# Altium PCB Thermostat_EEM_Cryo.PCBDOC (part 1 of 2)
Units mm, origin at the board's own origin, x right, y up, seen from the top; angles counter-clockwise.
Board outline 44.89 x 73.5 mm, 4 copper layers (TOP, G1, L2, BOT), stack 1.55 mm thick; 85 components, 79 nets, 401 pads, 80 vias.
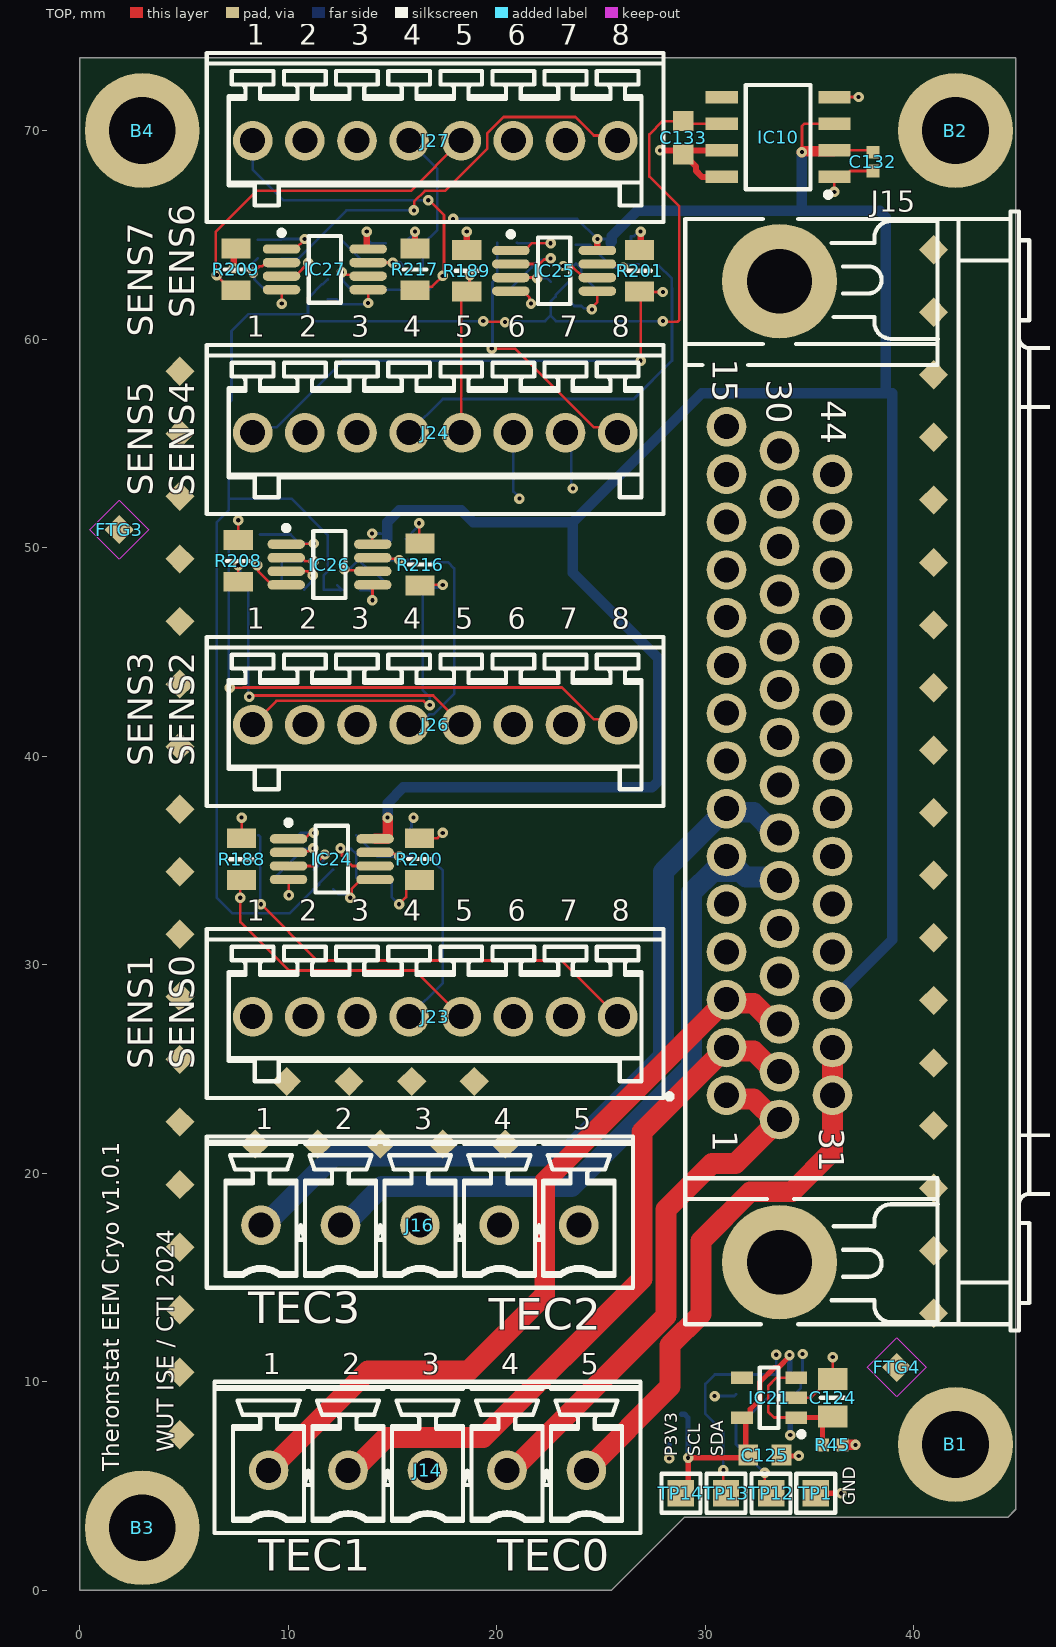
[diagram p0: TOP view]
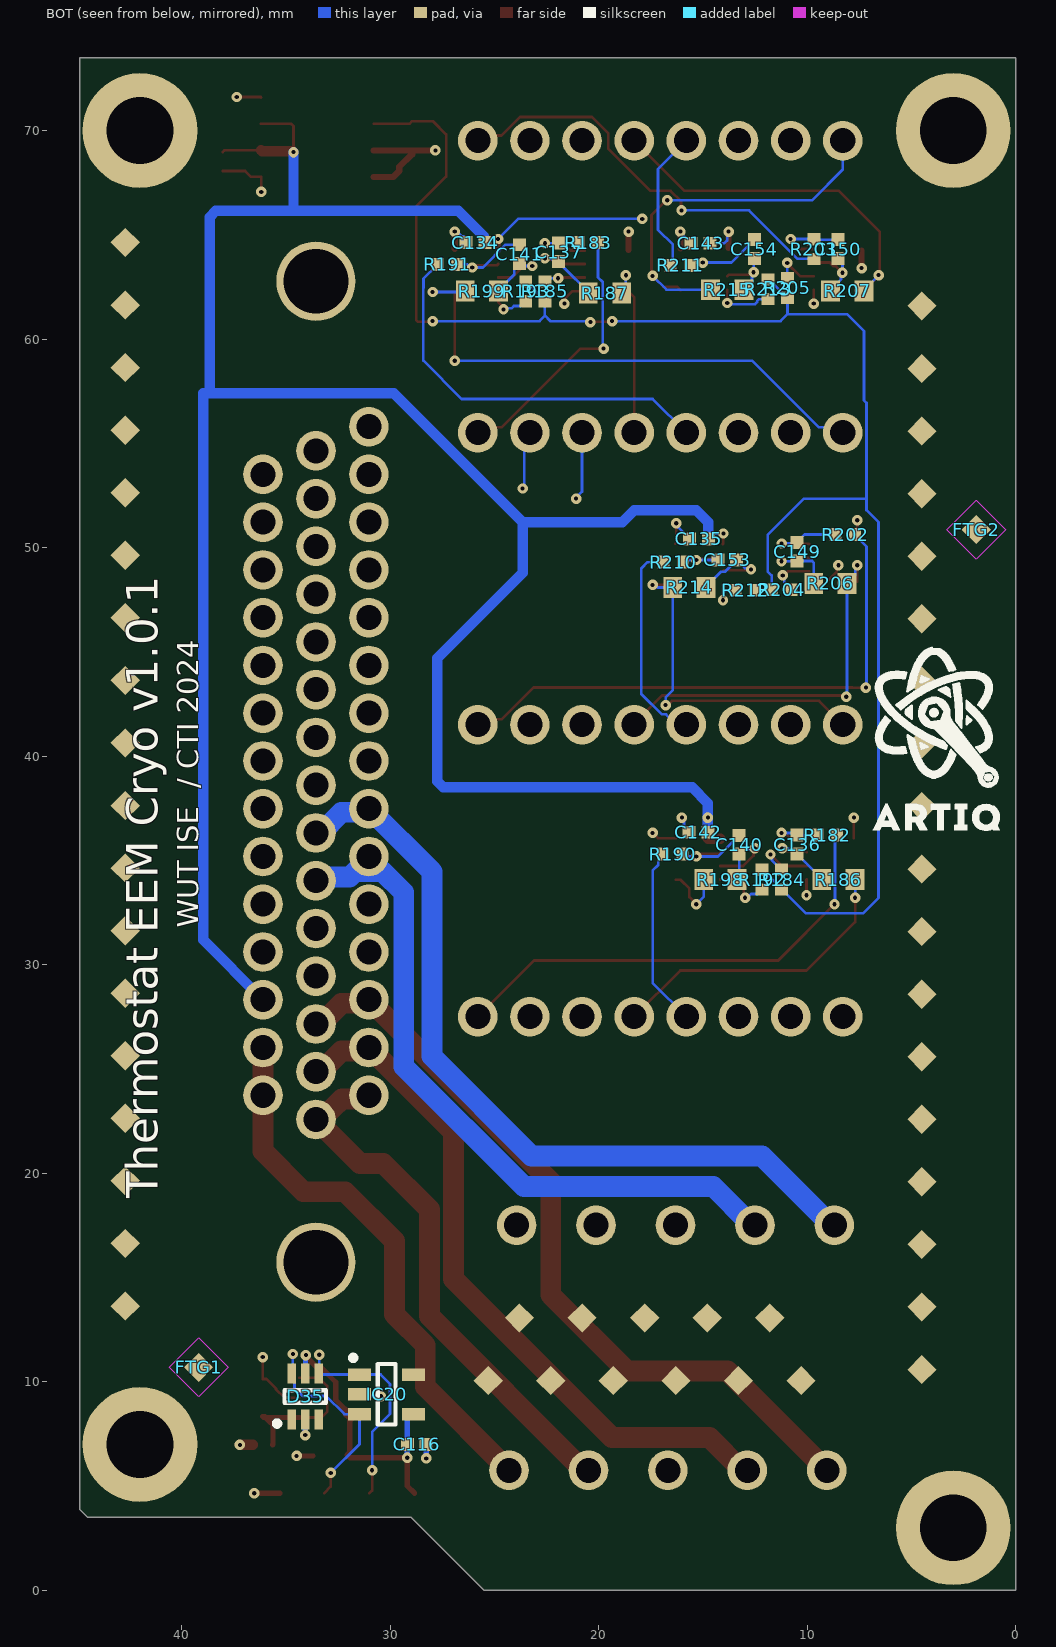
[diagram p1: BOT view, seen from below]
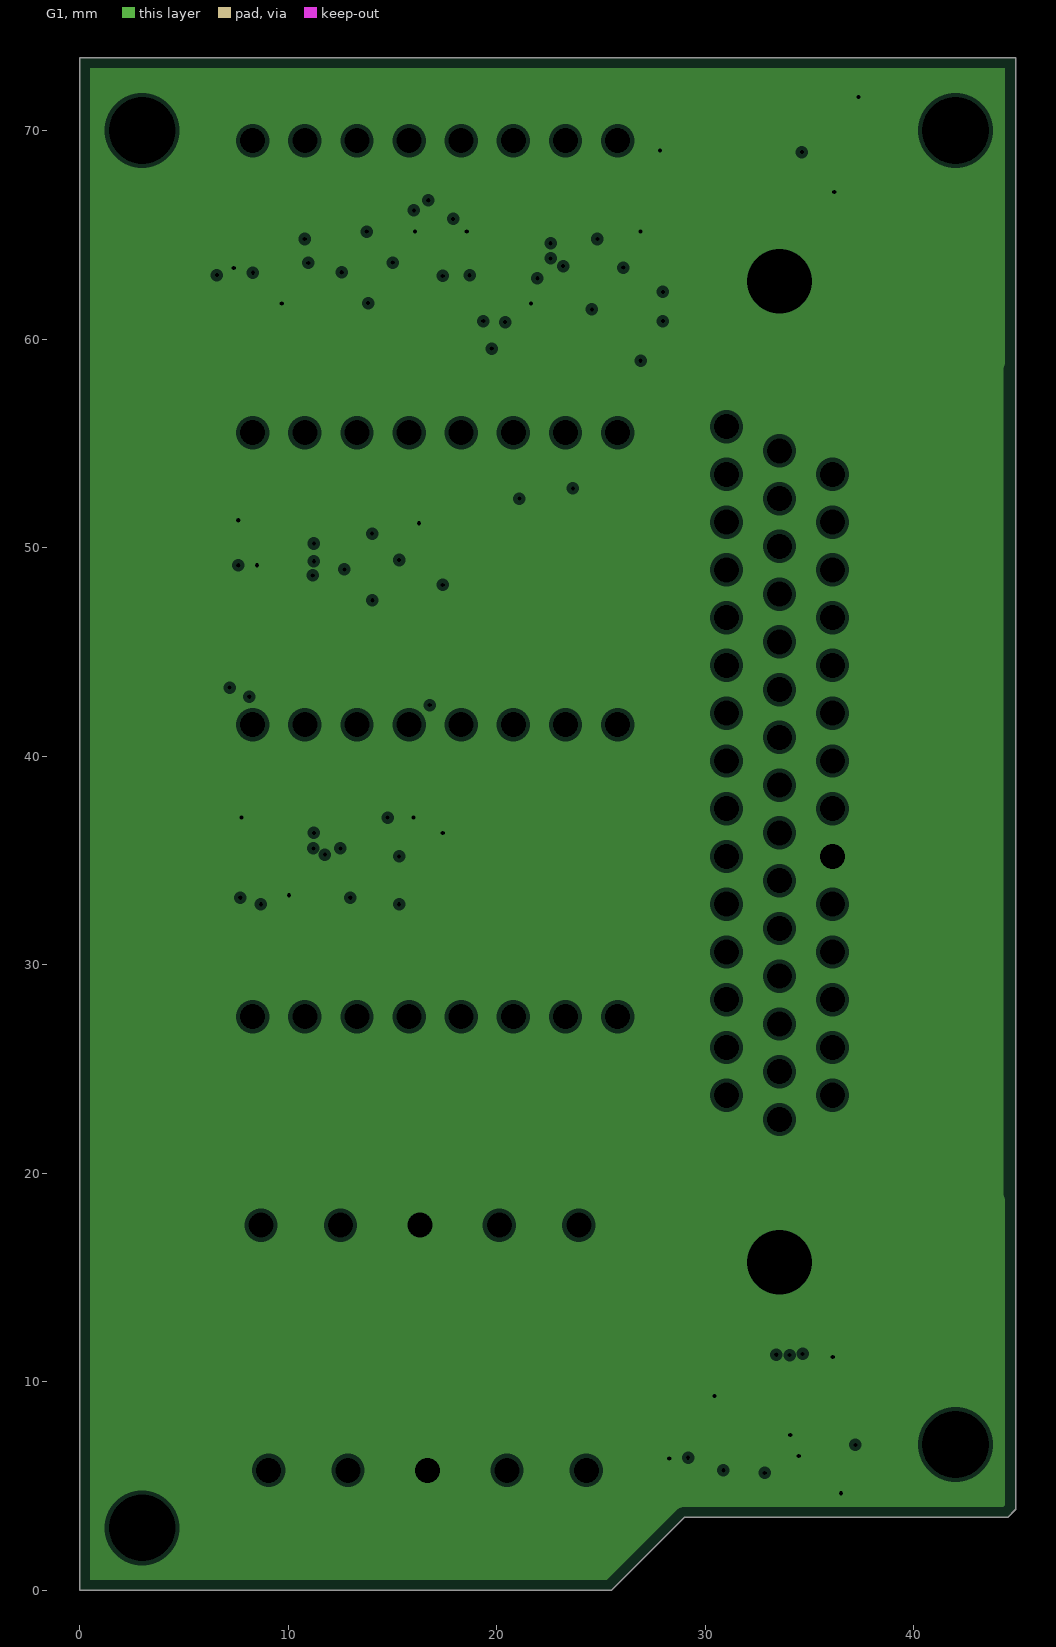
[diagram p2: G1, clearances drawn from the general rule]
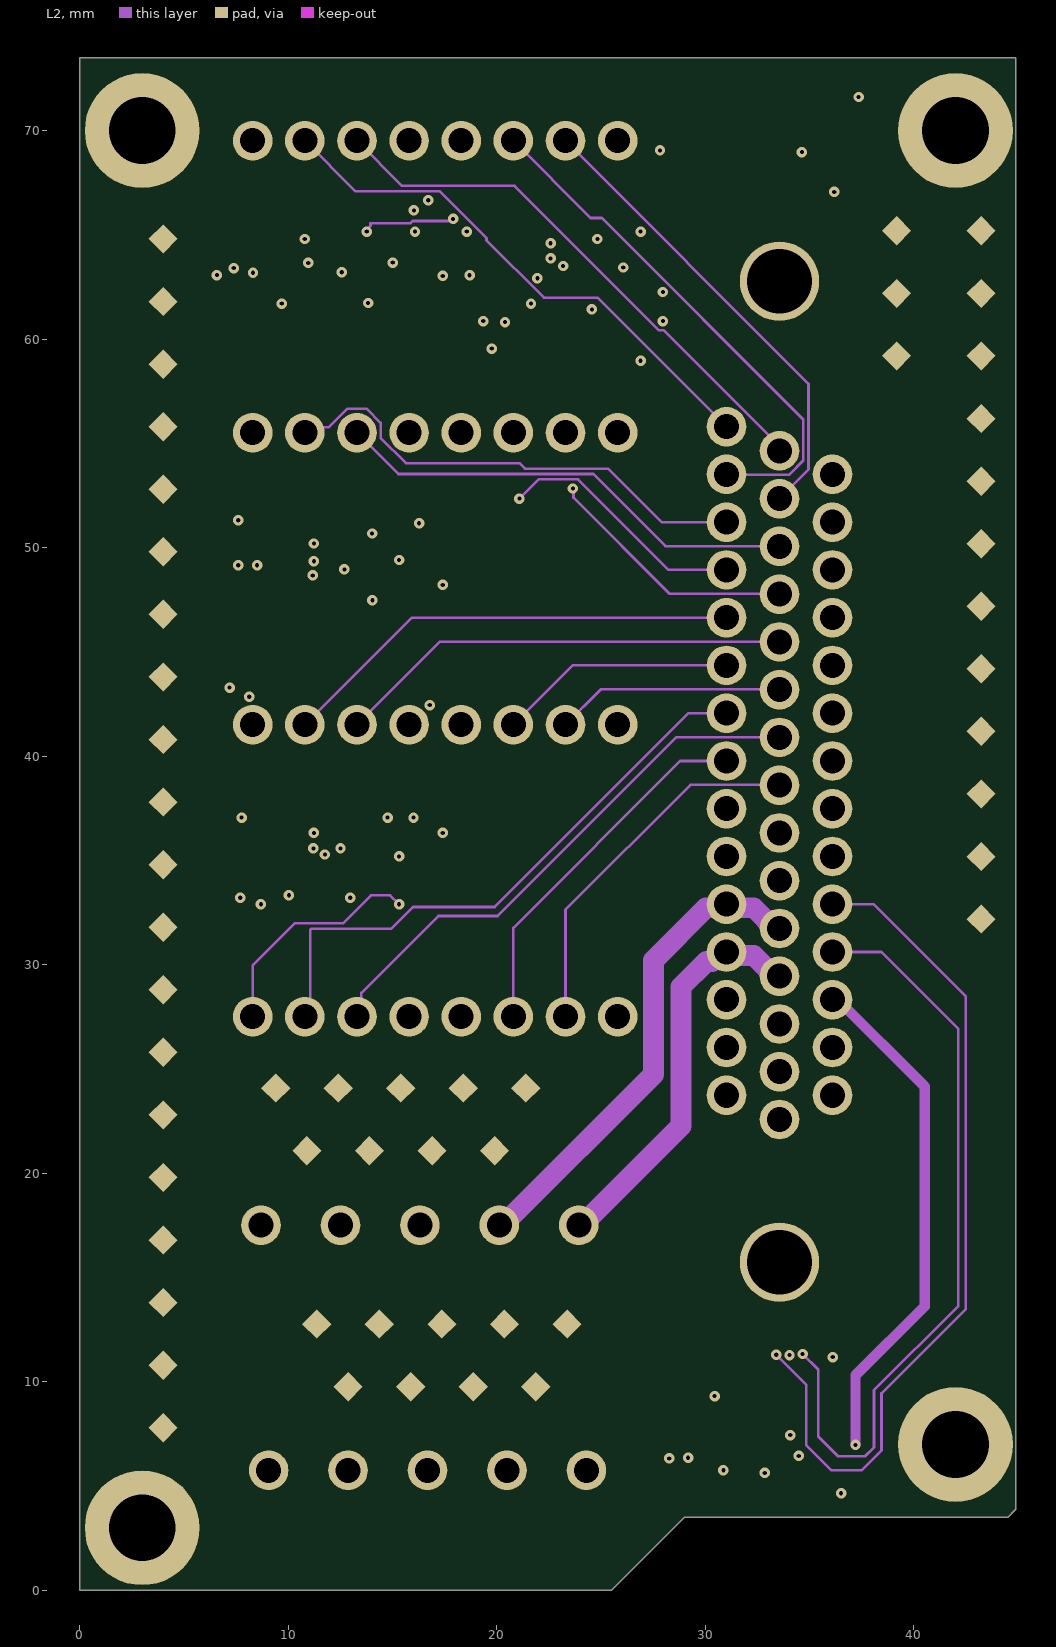
[diagram p3: L2]

## Layer stack, top to bottom
TopSolder: solder mask 0.01, Solder Resist, Dk 3.5
TOP: signal copper 0.035
Dielectric1: prepreg 0.18, FR-4, Dk 4.8
G1: plane copper 0.035, net GND
Dielectric2: core 1.05, Core-042, Dk 4.6
L2: signal copper 0.035
Dielectric3: prepreg 0.18, FR-4, Dk 4.8
BOT: signal copper 0.035
BottomSolder: solder mask 0.01, Solder Resist, Dk 3.5

## Board outline
0,0 25.493,0 28.993,3.5 44.503,3.5 44.894,3.891 44.894,73.5 0,73.5

## Design rules (kind name [scope] priority, off if disabled: settings)
AcuteAngle [All] p1: minimum=6.00000000000000E+0001 checktracksonly=FALSE
Clearance Clearance_HV [InNetClass('HV') vs not InNetClass('HV')] p1: gap=1 ignorepadtopadclearanceinfootprint=FALSE
Clearance Clearance_balancing [InNamedPolygon('balancing')] p2: gap=1.27 ignorepadtopadclearanceinfootprint=FALSE except(0.635: Via-Via Via-Fill Via-Poly Via-Region Via-Text Via-Hole)
Clearance Clearance_DIFF [(InDifferentialPairClass('All Differential Pairs')and IsTrack ) vs (InDifferentialPairClass('All Differential Pairs') and IsTrack  )] p3 off: gap=0.508 ignorepadtopadclearanceinfootprint=FALSE except(0: Arc-Hole Track-Hole SMDPad-Hole THPad-Hole Via-Hole Fill-Hole Poly-Hole Region-Hole Text-Hole; 0.127: SMDPad-SMDPad SMDPad-THPad SMDPad-Via SMDPad-Fill SMDPad-Poly SMDPad-Region SMDPad-Text THPad-THPad THPad-Via THPad-Fill THPad-Poly THPad-Region THPad-Text Via-Via Via-Fill Via-Poly Via-Region Via-Text)
Clearance [All] p4: gap=0.127 ignorepadtopadclearanceinfootprint=FALSE except(0: Arc-Hole Track-Hole SMDPad-Hole THPad-Hole Via-Hole Fill-Hole Poly-Hole Region-Hole Text-Hole; 0.203: Arc-Poly Track-Poly SMDPad-Poly THPad-Poly Via-Poly Fill-Poly Poly-Poly)
ComponentClearance [All] p1: gap=0 collisioncheckmode=3 verticalgap=0 showdistances=FALSE
DiffPairsRouting [All] p1: maxlimit=0.152 minlimit=0.127 mostfreqgap=0.152 toplayer_minwidth=0.127 toplayer_maxwidth=0.17 toplayer_prefwidth=0.152 midlayer1_minwidth=0.127 midlayer1_maxwidth=0.152 midlayer1_prefwidth=0.152 bottomlayer_minwidth=0.127 bottomlayer_maxwidth=0.17 bottomlayer_prefwidth=0.152 maxuncoupledlength=12.7
FabricationTestPointUsage TestPointUsage [All] p1: valid=0 allowmultiple=FALSE
FabricationTestpoint Testpoint [All] p1: side=3 testpointundercomponent=TRUE minsize=1.016 maxsize=2.54 preferedsize=1.524 minholesize=0.508 maxholesize=1.016 preferedholesize=0.813 testpointgrid=0.025 allowsidetop=TRUE allowsidebottom=TRUE usegrid=TRUE gridtolerance=0
Height [All] p1: minheight=0 maxheight=40 prefheight=40
HoleSize [All] p1: absolutevalues=TRUE maxlimit=3.81 minlimit=0.025 maxpercent=80.000 minpercent=20.000
HoleToHoleClearance [All] p1: gap=0.025 allowstackedmicrovias=TRUE
MinimumSolderMaskSliver [All] p1: minsoldermaskwidth=0
PlaneClearance PlaneClearance_HV [InNetClass('HV')] p1: clearance=1
PlaneClearance [All] p2: clearance=0.2
PlaneConnect [All] p1: pad.planeconnectstyle=Relief pad.reliefexpansion=0.254 pad.reliefentries=4 pad.reliefconductorwidth=0.254 pad.reliefairgap=0.152 via.planeconnectstyle=Direct via.reliefexpansion=0.508 via.reliefentries=4 via.reliefconductorwidth=0.254 via.reliefairgap=0.254
PolygonConnect PolygonConnect_Power [InComponent('C155') or InComponent('C156') or  InComponent('C157') or  InComponent('C158') or InComponent('C163') or InComponent('C164')  or InComponent('C165')or InComponent('C167') or InComponent('L2_1')  or InComponent('L2_2') or InComponent('L2_3') or InComponent('L2_4')    or InComponent('L4_1')  or InComponent('L4_2') or InComponent('L4_3') or InComponent('L4_4')] p1: connectstyle=Relief reliefconductorwidth=0.4 reliefentries=4 polygonreliefangle="90 Angle" airgapwidth=0.254
PolygonConnect PolygonConnect_BGA [HasFootprint('LGA25C127P5X5_625X625X192')] p2: connectstyle=Direct reliefconductorwidth=0.254 reliefentries=4 polygonreliefangle="90 Angle" airgapwidth=0.254
PolygonConnect PolygonConnect_pad [All] p3: thpad.connectstyle=Relief thpad.reliefconductorwidth=0.254 thpad.reliefentries=4 thpad.polygonreliefangle="90 Angle" thpad.airgapwidth=0.152 smdpad.connectstyle=Relief smdpad.reliefconductorwidth=0.254 smdpad.reliefentries=4 smdpad.polygonreliefangle="90 Angle" smdpad.airgapwidth=0.152 via.connectstyle=Direct via.reliefconductorwidth=0.254 via.reliefentries=4 via.polygonreliefangle="90 Angle" via.airgapwidth=0.152
RoutingVias RoutingVias_HPOW [InNetClass('HPOW')] p1: holewidth=0.711 width=1.27 viastyle="Through Hole" minholewidth=0.711 minwidth=1.27 maxholewidth=0.711 maxwidth=1.27 useviatemplates=TRUE viatemplateguid#1={C4BC9E51-A50C-4827-9BB3-4603308538B4} viatemplateguid#2={CC3703E4-4F4D-4ECC-8BAE-5075FE03B580} viatemplateguid#3={B5D767B0-96F0-490E-9621-DF468C9DD5C8} viatemplatename#1=v50h20m0mx0 viatemplatename#2=v70h40m0mx0 viatemplatename#3=v66h33m0mx0
RoutingVias [All] p2: holewidth=0.2 width=0.5 viastyle="Through Hole" minholewidth=0.2 minwidth=0.5 maxholewidth=1 maxwidth=2 useviatemplates=TRUE viatemplateguid#1={C4BC9E51-A50C-4827-9BB3-4603308538B4} viatemplateguid#2={CC3703E4-4F4D-4ECC-8BAE-5075FE03B580} viatemplateguid#3={A86ABFB5-DEF7-4A39-8B53-0CFF0DEED7D0} viatemplateguid#4={09B06083-E995-414E-AB37-2F7DC4B9C6DF} viatemplateguid#5={C0EBE885-0A75-4383-AABD-E9C68A6ADC0C} viatemplateguid#6={B5D767B0-96F0-490E-9621-DF468C9DD5C8} viatemplateguid#7={4937D8D9-3ACA-4365-854C-C932E18BD1B1} viatemplatename#1=v50h20m0mx0 viatemplatename#2=v70h40m0mx0 viatemplatename#3=v60h30 viatemplatename#4=v60h30m0mx0 viatemplatename#5=v60h30m0mx0(1) viatemplatename#6=v66h33m0mx0 viatemplatename#7=v50h20m55mx0
SilkToSilkClearance [All] p1: silktosilkclearance=0
SilkToSolderMaskClearance SilkscreenOverComponentPads [IsPad] p1: minsilkscreentomaskgap=0 clearancetoexposedcopper=TRUE
SolderMaskExpansion [All] p1: expansion=0.015 istentingtop=FALSE
ViasUnderSMD ViasUnderSMD_QFN [HasFootprint('TSSOP28-EP')  or InComponent('IC11') or InComponent('IC18')  or InComponent('IC15') or InComponent('S1') or InComponent('S2') or InComponent('S3') or InComponent('S4')] p1: allowed=TRUE
ViasUnderSMD [All] p2: allowed=FALSE
Width Width_HPOW [InNetClass('HPOW')] p1: maxlimit=4 minlimit=0.254 preferedwidth=0.5
Width [All] p2: maxlimit=1.27 minlimit=0.127 preferedwidth=0.127
18 further rules are at their usual default settings.

## Components (designator, comment, footprint, x,y, rotation, side; value= is the part's Value field where it differs from the comment)
B1 "Plated Hole" MTG320_550#1 69.353,2.923 r90 top
B2 "Plated Hole" MTG320_550#2 62.553,2.923 r90 top
B3 "Plated Hole" MTG320_550#3 3.5,3.822 r90 top
B4 "Plated Hole" MTG320_550#4 19.356,-10.5 r90 top
C116 "100nF" CAPC1005X55N 28.728,7.001 r0 bottom
C124 "10uF" CAPC2012X135N 36.112,9.24 r90 top
C125 "1uF" CAPC1608X87N 32.862,6.49 r180 top
C132 "100nF" CAPC1005X55N 38.035,68.512 r270 top
C133 "1uF" CAPC1608X87N 28.948,69.653 r90 top
C134 "100nF" CAPC1005X55N 25.912,64.624 r180 bottom
C135 "100nF" CAPC1005X55N 15.193,50.425 r180 bottom
C136 "1nF" CAPC1005X55N 10.493,35.763 r90 bottom
C137 "1nF" CAPC1005X55N 21.924,64.166 r90 bottom
C140 "1nF" CAPC1005X55N 13.271,35.753 r90 bottom
C141 "1nF" CAPC1005X55N 23.805,64.077 r90 bottom
C142 "100nF" CAPC1005X55N 15.219,36.353 r180 bottom
C143 "100nF" CAPC1005X55N 15.117,64.598 r180 bottom
C149 "1nF" CAPC1005X55N 10.493,49.808 r90 bottom
C150 "1nF" CAPC1005X55N 8.535,64.321 r90 bottom
C153 "1nF" CAPC1005X55N 13.835,49.409 r0 bottom
C154 "1nF" CAPC1005X55N 12.535,64.321 r90 bottom
D35 "DRTR5V0U4S-7" SOT65P210X110-6N 34.075,9.3 r90 bottom
FTG1 "Use only in PCB" FIDUCIAL_TOP_S100-200 39.19,10.69 r90 bottom
FTG2 "Use only in PCB" FIDUCIAL_TOP_S100-200 1.897,50.871 r90 bottom
FTG3 "Use only in PCB" FIDUCIAL_TOP_S100-200 1.897,50.871 r90 top
FTG4 "Use only in PCB" FIDUCIAL_TOP_S100-200 39.19,10.69 r90 top
IC10 "LM4140ACM-1.2/NOPB" SOIC127P600X175-8N 33.495,69.685 r180 top
IC20 "24AA02E48T-I/OT" SOT95P280X145-5N 30.175,9.4 r180 bottom
IC21 "ADP150AUJZ-3.3-R7" SOT95P280X90-5N 33.062,9.24 r180 top
IC24 "ADA4528-2ARMZ-RL" ADI-RM-8_N 12.093,35.063 r0 top
IC25 "ADA4528-2ARMZ-RL" ADI-RM-8_N 22.752,63.277 r0 top
IC26 "ADA4528-2ARMZ-RL" ADI-RM-8_N 11.981,49.193 r0 top
IC27 "ADA4528-2ARMZ-RL" ADI-RM-8_N 11.76,63.346 r0 top
J1 "691381000008" WURTH_691381000008 33.072,109.493 r270 top
J3 "691381000008" WURTH_691381000008 9.678,109.493 r270 top
J14 "" PHOENIX_1803455 16.684,5.756 r0 top
J15 "D-Sub" AMPHENOL_10090926-P444XLF 33.56,39.264 r270 top locked
J16 "" PHOENIX_1803455 16.32,17.514 r0 top
J19 "" PHOENIX_1803604 81.961,-33.12 r90 top
J20 "" PHOENIX_1803604 60.854,-33.247 r90 top
J22 "691381000008" WURTH_691381000008 55.957,109.493 r270 top
J23 "" PHOENIX_1881613 17.05,27.514 r0 top
J24 "" PHOENIX_1881613 17.05,55.514 r0 top
J25 "691381000008" WURTH_691381000008 78.08,110.255 r270 top
J26 "" PHOENIX_1881613 17.05,41.514 r0 top
J27 "" PHOENIX_1881613 17.05,69.514 r0 top
R45 "33" RESC1005X40N 36.112,6.98 r180 top
R182 "120k" RESC1005X40N 9.048,36.213 r180 bottom
R183 "120k" RESC1005X40N 20.503,64.627 r180 bottom
R184 "120k" RESC1005X40N 11.235,34.088 r90 bottom
R185 "120k" RESC1005X40N 22.585,62.287 r90 bottom
R186 "0" RESC1608X55N 8.509,34.088 r0 bottom
R187 "0" RESC1608X55N 19.702,62.211 r0 bottom
R188 "120k" RESC2012X60N 7.768,35.063 r270 top
R189 "120k" RESC2012X60N 18.567,63.277 r270 top
R190 "120k" RESC1005X40N 16.451,35.303 r0 bottom
R191 "120k" RESC1005X40N 27.271,63.582 r0 bottom
R192 "120k" RESC1005X40N 12.166,34.088 r270 bottom
R193 "120k" RESC1005X40N 23.499,62.287 r270 bottom
R198 "0" RESC1608X55N 14.168,34.088 r180 bottom
R199 "0" RESC1608X55N 25.602,62.302 r180 bottom
R200 "120k" RESC2012X60N 16.293,35.071 r270 top
R201 "120k" RESC2012X60N 26.852,63.277 r270 top
R202 "120k" RESC1005X40N 8.183,50.628 r180 bottom
R203 "120k" RESC1005X40N 9.685,64.321 r270 bottom
R204 "120k" RESC1005X40N 11.235,47.981 r180 bottom
R205 "120k" RESC1005X40N 10.952,62.452 r90 bottom
R206 "0" RESC1608X55N 8.894,48.283 r0 bottom
R207 "0" RESC1608X55N 8.081,62.312 r0 bottom
R208 "120k" RESC2012X60N 7.606,49.368 r270 top
R209 "120k" RESC2012X60N 7.498,63.346 r270 top
R210 "120k" RESC1005X40N 16.42,49.307 r0 bottom
R211 "120k" RESC1005X40N 16.081,63.531 r0 bottom
R212 "120k" RESC1005X40N 12.981,47.958 r0 bottom
R213 "120k" RESC1005X40N 11.891,62.388 r270 bottom
R214 "0" RESC1608X55N 15.651,48.093 r180 bottom
R215 "0" RESC1608X55N 13.835,62.371 r180 bottom
R216 "120k" RESC2012X60N 16.325,49.193 r270 top
R217 "120k" RESC2012X60N 16.082,63.346 r270 top
SCREW1 "09670009972" 3M_3341-31 55.7,15.3 r0 top
SCREW2 "09670009972" 3M_3341-31 55.7,63.075 r0 top
TP1 "Test Point" TPS127 35.3,4.663 r90 top
TP12 "Test Point" TPS127 33.161,4.663 r90 top
TP13 "Test Point" TPS127 30.996,4.663 r90 top
TP14 "Test Point" TPS127 28.832,4.663 r90 top

## Footprints (in the part's own frame and the unit in brackets; to place one, negate y for a bottom-side part, rotate by r counter-clockwise, add the part's x,y. Pads: shape width x height; smd on the part's side, far side on the other; paste and mask are expansions set on the pad)
3M_3341-31 [mm] "MDR Female Screw Locks : Thread Length= 3.8mm, Thread Size: M2.5"
  silkscreen extent -4.04,-2.74 5.26,2.74, body extent -9.01,-2.74 5.26,2.74, height 2.37
ADI-RM-8_N [mm] "SOP, 8-Leads, Body 3x3mm, Pitch 0.65mm, IPC Medium Density"
  oval 1.8x0.45 smd: 1(-2.075,0.975) 2(-2.075,0.325) 3(-2.075,-0.325) 4(-2.075,-0.975) 5(2.075,-0.975) 6(2.075,-0.325) 7(2.075,0.325) 8(2.075,0.975)
  silkscreen extent -2.2,-1.6 0.77,1.87, body extent -1.6,-1.6 1.6,1.6, height 1.1
AMPHENOL_10090926-P444XLF [mm] "Right Angle High Density D-sub 44 Male Contacts with Harpoons + UNC 4-40 Clinchnuts + Electrical Continuity"
  round 1.9 hole 1.2: 1(15.52,-2.54) 2(13.23,-2.54) 3(10.94,-2.54) 4(8.65,-2.54) 5(6.36,-2.54) 6(4.07,-2.54) 7(1.78,-2.54) 8(-0.51,-2.54) 9(-2.8,-2.54) 10(-5.09,-2.54) 11(-7.38,-2.54) 12(-9.67,-2.54) 13(-11.96,-2.54) 14(-14.25,-2.54) 15(-16.54,-2.54) 16(16.682,0) 17(14.392,0) 18(12.102,0) 19(9.812,0) 20(7.522,0) 21(5.232,0) 22(2.942,0) 23(0.652,0) 24(-1.638,0) 25(-3.928,0) 26(-6.218,0) 27(-8.508,0) 28(-10.798,0) 29(-13.088,0) 30(-15.378,0) 31(15.52,2.54) 32(13.23,2.54) 33(10.94,2.54) 34(8.65,2.54) 35(6.36,2.54) 36(4.07,2.54) 37(1.78,2.54) 38(-0.51,2.54) 39(-2.8,2.54) 40(-5.09,2.54) 41(-7.38,2.54) 42(-9.67,2.54) 43(-11.96,2.54) 44(-14.25,2.54)
  round 5.5 / inner round 3.8 / far side round 3.8 hole 3.1: 45(-23.513,0) 46(23.527,0)
  silkscreen extent -26.86,-5.4 26.8,17.18, body extent -26.86,-4.57 26.8,17.13, height 12.55
CAPC1005X55N [mm] "Capacitor, Non-Polarized, Chip; 1.00mm L X 0.50mm W X 0.70mm H, IPC Medium Density"
  rect 0.62x0.62 smd: 1(-0.45,0) 2(0.45,0)
  body extent -0.52,-0.27 0.53,0.28, height 0.55
CAPC1608X87N [mm] "Chip Capacitor, Body 1.6x0.8mm IPC Medium Density"
  rect 0.95x1 smd: 1(-0.8,0) 2(0.8,0)
  body extent -0.87,-0.47 0.88,0.48, height 0.87
CAPC2012X135N [mm] "Chip Capacitor, Body 2.0x1.25mm, IPC Medium Density"
  rect 1.05x1.4 smd: 1(-0.9,0) 2(0.9,0)
  silkscreen extent 0,-0.58 0,0.58, body extent -1.05,-0.67 1.05,0.68, height 1.25
FIDUCIAL_TOP_S100-200 [mm] "Square Fiducial Target, Top Layer, 1.0mm, Top Solder 2.0mm, Keepout =2.0mm"
  rect 1x1 smd rot 45 paste-0.51 mask+0.5: 1(0,0)
  TOP keep-out region: 1.414,0 0,-1.414 -1.414,0 0,1.414
MTG320_550#1 [mm] "Plated Through Hole: Hole Dia.=3.2mm Pad Dia.=5.5mm"
  round 5.5 hole 3.2: 1(4.077,27.353)
MTG320_550#2 [mm] "Plated Through Hole: Hole Dia.=3.2mm Pad Dia.=5.5mm"
  round 5.5 hole 3.2: 1(67.077,20.553)
MTG320_550#3 [mm] "Plated Through Hole: Hole Dia.=3.2mm Pad Dia.=5.5mm"
  round 5.5 hole 3.2: 1(-0.822,0.5)
MTG320_550#4 [mm] "Plated Through Hole: Hole Dia.=3.2mm Pad Dia.=5.5mm"
  round 5.5 hole 3.2: 1(80.5,16.356)
PHOENIX_1803455 [mm] "PCB Header, 8A, 160 V, Pitch: 3.81mm, 5 Positions, MCV Serie"
  round 1.9 hole 1.2: 1(-7.62,0) 2(-3.81,0) 3(0,0) 4(3.81,0) 5(7.62,0)
  silkscreen extent -10.22,-3 10.22,4.25, body extent -10.22,-3 10.22,4.25, height 9.2
PHOENIX_1803604 [mm] "3.85 5 way connector"
  silkscreen extent 7.82,-12.17 17.32,7.72, body extent 1.22,-12.12 17.32,7.72, height 7.6
PHOENIX_1881613 [mm] "MICRO COMBICON PCB Header, 4 A 80 V, Pitch: 2.5 mm, 8 Positions"
  round 1.9 hole 1.2: 1(-8.75,0) 2(-6.25,0) 3(-3.75,0) 4(-1.25,0) 5(1.25,0) 6(3.75,0) 7(6.25,0) 8(8.75,0)
  silkscreen extent -10.95,-3.9 10.95,4.2, body extent -10.95,-3.9 10.95,4.2, height 10.1
RESC1005X40N [mm] "Chip Resistor, EIA 0402, Metric 1005, Body 1.0x0.5mm, IPC Medium Density"
  rect 0.58x0.62 smd: 1(-0.47,0) 2(0.47,0)
  body extent -0.52,-0.27 0.53,0.28, height 0.4
RESC1608X55N [mm] "Chip Resistor, EIA 0603, Metric 1608, Body 1.6x0.8mm, IPC Medium Density"
  rect 0.9x1 smd: 1(-0.8,0) 2(0.8,0)
  body extent -0.87,-0.47 0.88,0.48, height 0.55
RESC2012X60N [mm] "Chip Resistor, EIA 0805, Metric 2012, Body 2.0x1.2mm, IPC Medium Density"
  rect 0.95x1.4 smd: 1(-1,0) 2(1,0)
  silkscreen extent 0,-0.55 0,0.55, body extent -1.1,-0.67 1.1,0.68, height 0.6
SOIC127P600X175-8N [mm] "SOIC 8, Pitch 1.27mm - Body 4x5mm, IPC Medium Density"
  rect 1.55x0.6 smd: 1(-2.7,1.905) 2(-2.7,0.635) 3(-2.7,-0.635) 4(-2.7,-1.905) 5(2.7,-1.905) 6(2.7,-0.635) 7(2.7,0.635) 8(2.7,1.905)
  silkscreen extent -2.53,-2.5 1.55,2.88, body extent -3.1,-2.5 3.1,2.5, height 1.75
SOT65P210X110-6N [mm] "SOT363, SC70-6, SOT, 0.65mm Pitch, 6 Pin, 1.25mm W X 2.00mm L X 1.10mm H, IPC Medium Density"
  rect 0.95x0.4 smd: 1(-1.1,0.65) 2(-1.1,0) 3(-1.1,-0.65) 4(1.1,-0.65) 5(1.1,0) 6(1.1,0.65)
  silkscreen extent -1.42,-1 0.3,1.48, body extent -1.2,-1.1 1.2,1.1, height 1.1
SOT95P280X90-5N [mm] "SOT, 0.95mm Pitch; 5 Pin, 1.60mm W X 2.90mm L X 0.90mm H body, IPC Medium"
  rect 1.05x0.6 smd: 1(-1.3,0.95) 2(-1.3,0) 3(-1.3,-0.95) 4(1.3,-0.95) 5(1.3,0.95)
  silkscreen extent -1.68,-1.45 0.45,1.87, body extent -1.4,-1.5 1.4,1.5, height 0.9
SOT95P280X145-5N [mm] "SOT, 0.95mm pitch; 5 pin, 1.60mm W X 2.90mm L X 1.45mm H body, IPC Medium Density"
  rect 1.1x0.6 smd: 1(-1.3,0.95) 2(-1.3,0) 3(-1.3,-0.95) 4(1.3,-0.95) 5(1.3,0.95)
  silkscreen extent -1.73,-1.45 0.43,1.87, body extent -1.4,-1.5 1.4,1.5, height 1.45
TPS127 [mm] "1.27 x  1.27mm SMD Test Point Area"
  rect 1.27x1.27 smd paste-1.27: 1(0,0)
  silkscreen extent -0.94,-0.94 0.94,0.94
WURTH_691381000008 [mm] "2.5mm 8 way connector"
  silkscreen extent -0.02,-9.63 11.62,10.98, body extent -0.03,-9.6 11.77,11, height 23.6

## Part data
B1 B2 B3 B4: library part PLATED_HOLE3.2_PAD5.5, "Single Terminal Socket", Author="CERN DEM JMW", Component Type="Standard (No BOM)", ComponentHeight=0mm, CreateDate=01.10.2012, Family="Plated Hole", HelpURL=Undefined, LatestRevisionDate=01.10.2012, Mounted=No, PackageDescription="Plated Through Hole: Hole Dia.=3.2mm Pad Dia.=5.5mm", Part Description="Plated Through Hole: Hole Dia.=3.2mm Pad Dia.=5.5mm", Part Number=PLATED_HOLE3.2_PAD5.5, Pin Count=1, Sense=No, SMD=No, Socket=No, Status=None
C116 C132 C134 C135 C142 C143: library part CC0402_100NF_16V_10%_X5R, "Non-polarised capacitor", Case=0402, Manufacturer=GENERIC, Manufacturer1 ComponentHeight=0.55mm, Manufacturer1 Example=MURATA, Manufacturer1 Part Number=GRM155R61C104KA88D, Tolerance=±10%, Voltage=16V, Author="CERN DEM JLC", Component Type=Standard, CreateDate=10.12.2013, HelpURL=\\cern.ch\dfs\Applications\Altium\Datasheets\CC0402_X5R_MURATA_GRM.pdf, LatestRevisionDate=10.12.2013, Manufacturer Part Number=CC0402_100NF_16V_10%_X5R, Mounted=Yes, Part Description="SMD Multilayer Chip Ceramic Capacitor", Part Number=CC0402_100NF_16V_10%_X5R, Pin Count=2, Sense=No, SMD=Yes, Socket=No, Status=None, TC=X5R
C124: library part CC0805_10UF_16V_10%_X5R, "Non-polarised capacitor", Case=0805, Manufacturer=GENERIC, Manufacturer1 ComponentHeight=1.4mm, Manufacturer1 Example=KEMET, Manufacturer1 Part Number=C0805C106K4PAC, Tolerance=±10%, Voltage=16V, Author="CERN DEM JLC", Component Type=Standard, CreateDate=03.12.2007, HelpURL=\\cern.ch\dfs\Applications\Altium\Datasheets\CC1206_X5R_KEMET.pdf, LatestRevisionDate=03.12.2007, Manufacturer Part Number=CC0805_10UF_16V_10%_X5R, Mounted=Yes, Part Description="SMD Multilayer Chip Ceramic Capacitor", Part Number=CC0805_10UF_16V_10%_X5R, Pin Count=2, Sense=No, SMD=Yes, Socket=No, Status=Preferred, TC=X5R
C125 C133: library part CC0603_1UF_25V_10%_X7R, "Non-polarised capacitor", Case=0603, Manufacturer=GENERIC, Manufacturer1 ComponentHeight=0.9mm, Manufacturer1 Example=MURATA, Manufacturer1 Part Number=GRM188R71E105KA12D, Tolerance=±10%, Voltage=25V, Author="CERN DEM JLC", Component Type=Standard, CreateDate=18/01/2011, HelpURL=\\cern.ch\dfs\Applications\Altium\Datasheets\CC0603_X7R_MURATA.pdf, LatestRevisionDate=18/01/2011, Manufacturer Part Number=CC0603_1UF_25V_10%_X7R, Mounted=Yes, Part Description="SMD Multilayer Chip Ceramic Capacitor", Part Number=CC0603_1UF_25V_10%_X7R, Pin Count=2, Sense=No, SMD=Yes, Socket=No, Status=None, TC=X7R
C136 C137 C140 C141 C149 C150 C153 C154: library part CC0402_1NF_50V_10%_X7R, "Non-polarised capacitor", Case=0402, Manufacturer=GENERIC, Manufacturer1 ComponentHeight=0.55mm, Manufacturer1 Example=PHYCOMP, Manufacturer1 Part Number=223858715623, Tolerance=±10%, Voltage=50V, Author="CERN DEM JLC", Component Type=Standard, CreateDate=03/12/2007, HelpURL=\\cern.ch\dfs\Applications\Altium\Datasheets\CC0402_X7R_PHYCOMP.pdf, LatestRevisionDate=03/12/2007, Manufacturer Part Number=CC0402_1NF_50V_10%_X7R, Mounted=Yes, Part Description="SMD Multilayer Chip Ceramic Capacitor", Part Number=CC0402_1NF_50V_10%_X7R, Pin Count=2, Sense=No, SMD=Yes, Socket=No, Status="Not Recommended", TC=X7R
D35: library part D_TVS_DRTR5V0U4S-7, "Integrated Quad Ultra-Low Capacitance ESD Protection", Case=SOT363, Manufacturer=DIODES, Author=GK, Bonding=No, Component Type=Standard, ComponentHeight=1.1mm, CreateDate=24.01.2017, Device=DRTR5V0U4S-7, HelpURL=\\cern.ch\dfs\Applications\Altium\Datasheets\PRTR5V0U4Y.pdf, LatestRevisionDate=14.09.2020, Manufacturer Part Number=DRTR5V0U4S-7, Mounted=Yes, PackageDescription="SOT363, SC70-6, 0.65mm Pitch; 6 Pin, 1.25mm W X 2.00mm L X 1.10mm H body, IPC Medium Density", Part Description="Integrated Quad Ultra-Low Capacitance ESD (±8kV) Protection", Part Number=DRTR5V0U4S-7, Pin Count=6, PressFit=No, Sense=No, SMD=Yes, Socket=No, Status=Active, Status Comment=Active
FTG1 FTG2 FTG3 FTG4: library part FIDUCIAL_TARGET_S100-200, "Fiducial Target", Author="CERN DEM JLC", Component Type="Standard (No BOM)", ComponentHeight=0mm, CreateDate=09.02.2010, Family=Fiducial, HelpURL=Undefined, LatestRevisionDate=04.04.2012, Mounted=No, PackageDescription="Square Fiducial Target, Top Layer, 1.0mm, Top Solder 2.0mm, Keepout =2.0mm", Part Description="Square Fiducial Target, Top Layer, 1.0mm, Top Solder 2.0mm, Keepout =2.0mm", Part Number=FIDUCIAL_TARGET_S100-200, Pin Count=1, Sense=No, SMD=Yes, Socket=No, Status=None
IC10: "High Precision Low Noise Low Dropout Voltage Reference", Case=SOIC8, Manufacturer="TEXAS INSTRUMENTS", Author="CERN DEM JLC", Bonding=No, Component Type=Standard, ComponentHeight=1.75mm, CreateDate=17.11.2014, Device=LM4140ACM-1.2/NOPB, HelpURL=\\cern.ch\dfs\Applications\Altium\Datasheets\LM4140ACM-1.2-NOPB.pdf, LatestRevisionDate=17.11.2014, Manufacturer Part Number=LM4140ACM-1.2/NOPB, Mounted=Yes, PackageDescription="SOIC 8, Pitch 1.27mm, Body 4x5mm, IPC Medium Density", Part Description="1.2V 0.1% 3 ppm/°C, High Precision Low Noise Low Dropout Voltage Reference", Part Number=LM4140ACM-1.2/NOPB, Pin Count=8, PressFit=No, Sense=No, SMD=Yes, Socket=No
IC20: "1.7V-5.5V, 2K I2C Serial EEPROM With EUI-48 Node Identity", Case=SOT23-5, Manufacturer="MICROCHIP TECHNOLOGY", Author="CERN DEM MR", Bonding=No, Component Type=Standard, ComponentHeight=1.45mm, CreateDate=31.03.2016, Device=24AA02E48T-I/OT, HelpURL=\\cern.ch\dfs\Applications\Altium\Datasheets\24AA02E48T-I-OT.pdf, LatestRevisionDate=31.03.2016, Manufacturer Part Number=24AA02E48T-I/OT, Mounted=Yes, PackageDescription="SOT, 0.95mm pitch; 5 pin, 1.60mm W X 2.90mm L X 1.45mm H body, IPC Medium Density", Part Description="1.7V-5.5V, 2K I2C Serial EEPROM With EUI-48 Node Identity", Part Number=24AA02E48T-I/OT, Pin Count=5, PressFit=No, Sense=No, SMD=Yes, Socket=No
IC21: "Ultralow Noise, 150 mA CMOS Linear Regulator", Case=SOT23, Manufacturer="ANALOG DEVICES", Author="CERN DEM JLC", Bonding=No, Component Type=Standard, ComponentHeight=0.9mm, CreateDate=27/09/2011, Device=ADP150AUJZ-3.3-R7, HelpURL=\\cern.ch\dfs\Applications\Altium\Datasheets\ADP150AUJZ-3.3-R7.pdf, LatestRevisionDate=19/06/2014, Manufacturer Part Number=ADP150AUJZ-3.3-R7, Mounted=Yes, PackageDescription="SOT23, 0.95mm pitch; 5 pin, 1.75mm W X 3.00mm L, IPC Medium Density", Part Description="3.3V, 150mA, Ultralow Noise, CMOS Linear Regulator", Part Number=ADP150AUJZ-3.3-R7, Pin Count=5, PressFit=No, Sense=No, SMD=Yes, Socket=No
IC24 IC25 IC26 IC27: library part CMP-0384-01794-1, "Double Channel RRIO Operational Amplifier, 3.4 MHz BW, 500 mV/us SR, Industrial, 8-pin SOP (RM-8), Reel", Amplifiers Per Package=2, Generic Part Number=ADA4528-2, Input Bias Current=125pA, Input Offset Voltage=300nV, Manufacturer="Analog Devices", Code_JEDEC=MO-187-AA, ComponentLink1Description="Manufacturer URL", ComponentLink1URL=http://www.analog.com/en/index.html, ComponentLink2Description=Datasheet, ComponentLink2URL=http://www.analog.com/static/imported-files/data_sheets/ADA4528-1_4528-2.pdf, ComponentLink3Description="Package Specification", ComponentLink3URL=http://www.analog.com/static/imported-files/packages/PKG_PDF/MSOP%28RM%29/RM_8.pdf, DatasheetVersion="Rev. C", Iq/Amp=1.5mA, Manufacturer Part Number=ADA4528-2ARMZ-RL, Mounting Technology="Surface Mount", PackageDescription="8-Pin Mini Small Outline Package, Body 3 x 3 mm, Pitch 0.65 mm", PackageReference=RM-8, Packing=Reel, Slew Rate=500mV/us, Small Signal Bandwidth=3.4MHz, V Span Max=5.5V, V Span Min=2.2V
J1 J3 J22 J25: library part CON_TB_WURTH_691381000008, "Phoenix Contact 2.5 pitch terminal plug, 8 ways", Manufacturer=WURTH, Manufacturer Part Number=691381000008
J14 J16: library part PHOENIX_1803455, "Connector 5 Male", Manufacturer="PHOENIX CONTACT", Manufacturer Part Number="1803455 (MCV 1,5/ 5-G-3,81)", Author="CERN DEM JLC", Component Type=Standard, ComponentHeight=9.2mm, CreateDate=04.11.2013, HelpURL=\\cern.ch\dfs\Applications\Altium\Datasheets\PHOENIX_1803455.pdf, LatestRevisionDate=04.11.2013, Mounted=Yes, Part Description="8A 160 V, Pitch: 3.81mm, 5 Positions Header", Part Number=PHOENIX_1803455, Pin Count=5, PressFit=No, Sense=No, SMD=No, Socket=No, Status=None
J15: library part AMPHENOL_10090926-P444XLF, "Connector D-sub 44 Male", Manufacturer=AMPHENOL, Manufacturer Part Number=10090926-P444XLF, Author="CERN DEM BC", Component Type=Standard, ComponentHeight=12.8mm, CreateDate=22.10.2020, Family=D-Sub, HelpURL=\\cern.ch\dfs\Applications\Altium\Datasheets\AMPHENOL_10090926-P444XLF.pdf, LatestRevisionDate=22.10.2020, Mounted=Yes, Part Description="Right Angle High Density D-sub 44 Male Contacts with Harpoons + UNC 4-40 Clinchnuts + Electrical Continuity", Part Number=AMPHENOL_10090926-P444XLF, Pin Count=46, PressFit=No, Sense=No, SMD=No, Socket=No, Status=None
J19 J20: library part PHOENIX_1803604, "Phoenix Contact 3.81 pitch terminal plug, 5 ways", Manufacturer="Phoenix Contact", Manufacturer Part Number="MC 1,5/ 5-ST-3,81 1803604", Mates with=PHOENIX_1803303
J23 J24 J26 J27: library part PHOENIX_1881613, "Connector 8 Male", Manufacturer="PHOENIX CONTACT", Manufacturer Part Number="1881613 (MCV 0,5/ 8-G-2,5)", Author="CERN DEM JLC", Component Type=Standard, ComponentHeight=10.1mm, CreateDate=03.11.2009, HelpURL=\\cern.ch\dfs\Applications\Altium\Datasheets\PHOENIX_1881613.pdf, LatestRevisionDate=10.02.2011, Mounted=Yes, Part Description="4A, 160V, MICRO COMBICON PCB Header, Pitch 2.5mm, 8 Positions", Part Number=PHOENIX_1881613, Pin Count=8, PressFit=No, Sense=No, SMD=No, Socket=No, Status=None
R45: library part R0402_33R_1%_0.0625W_100PPM, "Resistor - 1%", Case=0402, Manufacturer=GENERIC, Manufacturer1 ComponentHeight=0.4mm, Manufacturer1 Example="YAGEO PHYCOMP", Manufacturer1 Part Number=232270673309L, Power=0.0625W, Tolerance=±1%, Author="CERN DEM JLC", Component Type=Standard, CreateDate=03/12/2007, HelpURL=\\cern.ch\dfs\Applications\Altium\Datasheets\R0402_Phycomp_RC0402.pdf, LatestRevisionDate=17/10/2012, Manufacturer Part Number=R0402_33R_1%_0.0625W_100PPM, Mounted=Yes, Part Description="General Purpose Thick Film Chip Resistor", Part Number=R0402_33R_1%_0.0625W_100PPM, Pin Count=2, PressFit=No, Sense=No, SMD=Yes, Socket=No, Status="Not Recommended", TC=±100ppm/°C
R182 R183 R184 R185 R190 R191 R192 R193 R202 R203 R204 R205 R210 R211 R212 R213: library part R0402_120K_1%_0.0625W_100PPM, "Resistor - 1%", Case=0402, Manufacturer=GENERIC, Manufacturer1 ComponentHeight=0.4mm, Manufacturer1 Example="YAGEO PHYCOMP", Manufacturer1 Part Number=232270671204L, Power=0.0625W, Tolerance=±1%, Author="CERN DEM JLC", Component Type=Standard, CreateDate=03.12.2007, HelpURL=\\cern.ch\dfs\Applications\Altium\Datasheets\R0402_Phycomp_RC0402.pdf, LatestRevisionDate=17.10.2012, Manufacturer Part Number=R0402_120K_1%_0.0625W_100PPM, Mounted=Yes, Part Description="General Purpose Thick Film Chip Resistor", Part Number=R0402_120K_1%_0.0625W_100PPM, Pin Count=2, PressFit=No, Sense=No, SMD=Yes, Socket=No, Status="Not Recommended", TC=±100ppm/°C
R186 R187 R198 R199 R206 R207 R214 R215: library part R0603_0R_JUMPER, "Resistor", Case=0603, Manufacturer=GENERIC, Manufacturer1 ComponentHeight=0.55mm, Manufacturer1 Example="NIC COMPONENT", Manufacturer1 Part Number=NRC06Z0, Author="CERN DEM JLC", Component Type=Standard, CreateDate=03.12.2007, HelpURL=\\cern.ch\dfs\Applications\Altium\Datasheets\R0603_NIC_NRC.pdf, LatestRevisionDate=13.03.2008, Manufacturer Part Number=R0603_0R_JUMPER, Mounted=Yes, Part Description="1A (0.05R Max DC Resistance) Zero Ohm Jumper", Part Number=R0603_0R_JUMPER, Pin Count=2, PressFit=No, Sense=No, SMD=Yes, Socket=No, Status=Preferred
R188 R189 R200 R201 R208 R209 R216 R217: library part R0805_120K_0.1%_0.125W_25PPM, "Resistor - 0.1%", Case=0805, Manufacturer=GENERIC, Manufacturer1 ComponentHeight=0.6mm, Manufacturer1 Example=PANASONIC, Manufacturer1 Part Number=ERA6AEB124V, Power=0.125W, Tolerance=±0.1%, Author="CERN DEM JLC", Component Type=Standard, CreateDate=04.06.2015, HelpURL=\\cern.ch\dfs\Applications\Altium\Datasheets\R0805_PANASONIC_ERA.pdf, LatestRevisionDate=04.06.2015, Manufacturer Part Number=R0805_120K_0.1%_0.125W_25PPM, Mounted=Yes, Part Description="Thin Film Chip Resistor", Part Number=R0805_120K_0.1%_0.125W_25PPM, Pin Count=2, PressFit=No, Sense=No, SMD=Yes, Socket=No, Status="Not Recommended", TC=±25ppm
SCREW1 SCREW2: library part 3M_3341-31, "Female Screw Lock", Manufacturer=HARTING, Author=GK, Component Type=Mechanical, ComponentHeight=11mm, CreateDate=10.09.2013, HelpURL=\\cern.ch\dfs\Applications\Altium\Datasheets\TYCO_749087-2.pdf, LatestRevisionDate=10.09.2013, Manufacturer Part Number=09670009972, Mounted=Yes, PackageDescription="MDR Female Screw Locks, Thread Size: M2.5", Part Description="MDR Female Screw Locks, Thread Size: M2.5", Part Number=09670009972, Pin Count=0, PressFit=No, Sense=No, SMD=No, Socket=No, Status=None
TP1 TP12 TP13 TP14: library part SMD_PAD_1.27X1.27MM, Author="CERN DEM JLC", Component Type="Standard (No BOM)", ComponentHeight=0mm, CreateDate=12.01.2008, Family="Test Point", HelpURL=Undefined, LatestRevisionDate=12.01.2008, Mounted=No, PackageDescription="1.27mm x 1.27mm PCB Copper Area (SMD Test Point)", Part Description="1.27mm x 1.27mm PCB Copper Area (SMD Test Point)", Part Number=SMD_PAD_1.27X1.27MM, Pin Count=1, Sense=No, SMD=Yes, Socket=No, Status=None

## Free pads (board coordinates)
  rect 1x1 on Mid1 rot 135 paste-0.6 mask+0: BAL(4,7.801) BAL(4,10.801) BAL(4,13.801) BAL(4,16.801) BAL(4,19.801) BAL(4,22.801) BAL(4,25.801) BAL(4,28.801) BAL(4,31.801) BAL(4,34.801) BAL(4,37.801) BAL(4,40.801) BAL(4,43.801) BAL(4,46.801) BAL(4,49.801) BAL(4,52.801) BAL(4,55.801) BAL(4,58.801) BAL(4,61.801) BAL(4,64.801) BAL(39.175,59.191) BAL(39.175,62.191) BAL(39.175,65.191) BAL(43.224,32.191) BAL(43.224,35.191) BAL(43.224,38.191) BAL(43.224,41.191) BAL(43.224,44.191) BAL(43.224,47.191) BAL(43.224,50.191) BAL(43.224,53.191) BAL(43.224,56.191) BAL(43.224,59.191) BAL(43.224,62.191) BAL(43.224,65.191)
  rect 1x1 smd far side rot 135 paste-0.6 mask+0: BAL(4.5,10.59) BAL(4.5,13.59) BAL(4.5,16.59) BAL(4.5,19.59) BAL(4.5,22.59) BAL(4.5,25.59) BAL(4.5,28.59) BAL(4.5,31.59) BAL(4.5,34.59) BAL(4.5,37.59) BAL(4.5,40.59) BAL(4.5,43.59) BAL(4.5,46.59) BAL(4.5,49.59) BAL(4.5,52.59) BAL(4.5,55.59) BAL(4.5,58.59) BAL(4.5,61.59) BAL(42.711,13.636) BAL(42.711,16.636) BAL(42.711,19.636) BAL(42.711,22.636) BAL(42.711,25.636) BAL(42.711,28.636) BAL(42.711,31.636) BAL(42.711,34.636) BAL(42.711,37.636) BAL(42.711,40.636) BAL(42.711,43.636) BAL(42.711,46.636) BAL(42.711,49.636) BAL(42.711,52.636) BAL(42.711,55.636) BAL(42.711,58.636) BAL(42.711,61.636) BAL(42.711,64.636)
  rect 1x1 smd rot 135 paste-0.6 mask+0: BAL(4.81,7.461) BAL(4.81,10.461) BAL(4.81,13.461) BAL(4.81,16.461) BAL(4.81,19.461) BAL(4.81,22.461) BAL(4.81,25.461) BAL(4.81,28.461) BAL(4.81,31.461) BAL(4.81,34.461) BAL(4.81,37.461) BAL(4.81,40.461) BAL(4.81,43.461) BAL(4.81,46.461) BAL(4.81,49.461) BAL(4.81,52.461) BAL(4.81,55.461) BAL(4.81,58.461) BAL(40.95,13.289) BAL(40.95,16.289) BAL(40.95,19.289) BAL(40.95,22.289) BAL(40.95,25.289) BAL(40.95,28.289) BAL(40.95,31.289) BAL(40.95,34.289) BAL(40.95,37.289) BAL(40.95,40.289) BAL(40.95,43.289) BAL(40.95,46.289) BAL(40.95,49.289) BAL(40.95,52.289) BAL(40.95,55.289) BAL(40.95,58.289) BAL(40.95,61.289) BAL(40.95,64.289)
  rect 1x1 smd rot 45 paste-0.6 mask+0: BAL(8.422,21.403) BAL(9.922,24.403) BAL(11.422,21.403) BAL(12.922,24.403) BAL(14.422,21.403) BAL(15.922,24.403) BAL(17.422,21.403) BAL(18.922,24.403) BAL(20.422,21.403)
  rect 1x1 on Mid1 rot 45 paste-0.6 mask+0: BAL(9.4,24.089) BAL(10.9,21.089) BAL(11.374,12.771) BAL(12.4,24.089) BAL(12.874,9.771) BAL(13.9,21.089) BAL(14.374,12.771) BAL(15.4,24.089) BAL(15.874,9.771) BAL(16.9,21.089) BAL(17.374,12.771) BAL(18.4,24.089) BAL(18.874,9.771) BAL(19.9,21.089) BAL(20.374,12.771) BAL(21.4,24.089) BAL(21.874,9.771) BAL(23.374,12.771)
  rect 1x1 smd far side rot 45 paste-0.6 mask+0: BAL(10.3,10.064) BAL(11.8,13.064) BAL(13.3,10.064) BAL(14.8,13.064) BAL(16.3,10.064) BAL(17.8,13.064) BAL(19.3,10.064) BAL(20.8,13.064) BAL(22.3,10.064) BAL(23.8,13.064) BAL(25.3,10.064)

## Via types
v1: diameter 0.5, hole 0.2, TOP to BOT, tented both sides, 80 vias

## Nets (pads, with @x,y where several pads share a name; then routed paths per layer and width w, separated by ;. In a path a pad name is that pad's centre, name@x,y a point inside that pad or via, vN(x,y) a via of type N, cw(c..) or ccw(c..) an arc to the next point about the centre after c; other vN are vias at no path point)
BBC_SCL: D35.4 IC20.1 J15.35 TP13.1 | length 51.3
  TOP w0.127: v1(30.869,5.763) 30.869,4.79 TP13.1
  L2 w0.127: v1(33.405,11.301) 34.842,9.864 34.842,6.98 36.066,5.756 37.5,5.756 38.452,6.708 38.452,9.452 42.5,13.5 42.5,28.471 38.067,32.904 J15.35
  BOT w0.127: v1(30.869,5.763) 30.869,7.603 30.006,8.466 30.006,9.897 30.458,10.35 IC20.1 33.375,10.35 D35.4 33.405,10.42 v1(33.405,11.301)
BBC_SDA: D35.6 IC20.3 J15.34 TP12.1 | length 46.6
  TOP w0.127: v1(32.851,5.632) 32.851,4.972 TP12.1
  L2 w0.127: v1(34.667,11.338) 35.42,10.586 35.42,7.387 36.373,6.433 37.669,6.433 38.092,6.857 38.092,9.601 42.14,13.649 42.14,26.926 38.452,30.614 J15.34
  BOT w0.127: v1(32.851,5.632) 31.475,7.008 IC20.3 32.201,8.45 33.071,9.32 34.193,9.32 34.589,9.716 34.589,10.263 D35.6 34.667,10.458 v1(34.667,11.338)
GND: C116.1 C124.2 C125.1 C132.2 C133.1 C134.1 C135.1 C142.1 C143.1 D35.2 IC10.1 IC10.4 IC10.7 IC10.8 IC20.2 IC21.2 IC24.4 IC25.4 IC26.4 IC27.4 J14.3 J15.36 J15.45 J15.46 J16.3 R188.1 R189.1 R200.1 R201.1 R208.1 R209.1 R216.1 R217.1 TP1.1 | length 32.9
  TOP w0.127: R209.1@7.396,64.244 R209.1 ; R208.1 v1(7.606,51.315) ; R188.1 v1(7.768,37.054) ; v1(8.509,49.16) 8.58,49.089 8.58,48.869 9.231,48.218 IC26.4 ; IC27.4 9.692,62.365 v1(9.692,61.701) ; IC24.4 10.037,34.069 v1(10.037,33.331) ; v1(16.28,51.173) 16.28,50.239 R216.1 ; R200.1 17.166,36.071 v1(17.417,36.322) ; IC25.4 21.264,62.302 21.574,61.992 21.574,61.774 v1(21.645,61.703) ; R201.1 R201.1@26.903,64.328 ; C125.1 C125.1@33.703,6.449 ; IC21.2 35.078,9.24 35.476,9.638 35.476,9.679 35.937,10.14 C124.2 v1(36.112,11.185) ; v1(36.187,67.062) 36.187,67.772 IC10.1 36.67,67.78 36.952,68.062 C132.2 ; IC10.4 36.214,71.609 v1(37.355,71.609)
  TOP w0.254: C125.1@33.703,6.449 v1(34.488,6.449) ; TP1.1 35.304,4.66 v1(36.515,4.66)
  TOP w0.3: v1(7.396,63.404) R209.1@7.396,64.244 ; R217.1 v1(16.082,65.157) ; R189.1 v1(18.567,65.157) ; R201.1@26.903,64.328 v1(26.903,65.157) ; v1(27.83,69.05) IC10.7 ; C133.1 28.973,68.853 29.56,68.266 29.56,68.062 29.842,67.78 IC10.8
  BOT w0.127: C143.1 16.082,65.113 v1(16.082,65.157) ; C135.1 16.208,50.99 16.208,51.102 v1(16.28,51.173) ; C142.1 15.915,36.6 15.915,36.958 v1(16.011,37.054) ; C134.1 26.442,64.703 26.442,64.937 26.582,64.937 26.802,65.157 v1(26.903,65.157) ; v1(30.446,9.32) 31.395,9.32 IC20.2
  BOT w0.254: v1(28.273,6.328) 28.275,6.33 28.275,6.999 C116.1 ; v1(34.075,7.45) D35.2
NetC124_1: C124.1 IC21.1 IC21.3 R45.2 | length 8
  TOP w0.127: IC21.1 33.295,8.29 33.022,8.564 33.022,9.808 33.404,10.19 IC21.3 ; C124.1@35.762,7.99 36.062,8.29 C124.1
  TOP w0.254: IC21.1 C124.1@36.062,8.29 ; R45.2 35.622,7.001 35.622,7.942 36.02,8.34 C124.1
NetC136_1: C136.1 IC24.2 R186.2 | length 3.8
  TOP w0.127: IC24.2 10.08,35.45 10.98,35.45 11.109,35.579 v1(11.21,35.579)
  BOT w0.127: R186.2 9.309,34.138 9.696,34.525 9.704,34.525 10.739,35.56 11.19,35.56 v1(11.21,35.579)
NetC136_2: C136.2 IC24.1 R182.1 | length 3.1
  TOP w0.127: IC24.1 10.78,36.038 10.992,36.25 11.165,36.25 v1(11.237,36.322)
  BOT w0.127: R182.1 C136.2 10.601,36.322 v1(11.237,36.322)
NetC137_1: C137.1 IC25.2 R187.2 | length 4.9
  TOP w0.127: IC25.2 22.047,63.602 22.266,63.821 22.578,63.821 v1@22.627,63.871
  BOT w0.127: R187.2 20.502,62.261 21.678,63.437 21.678,63.47 21.988,63.78 v1(22.585,63.871)
NetC137_2: C137.2 IC25.1 R183.1 | length 3.7
  TOP w0.127: IC25.1 21.352,64.252 21.698,64.598 v1(22.585,64.598)
  BOT w0.127: R183.1 21.002,64.598 v1(22.585,64.598)
NetC140_1: C140.1 IC24.6 R198.2 | length 4.3
  TOP w0.127: v1(12.51,35.579) 12.581,35.508 12.581,35.234 13.077,34.738 IC24.6
  BOT w0.127: v1(12.51,35.579) 12.539,35.55 13.024,35.55 C140.1 13.271,34.185 R198.2
NetC140_2: C140.2 IC24.7 R190.1 | length 4.4
  TOP w0.127: IC24.7 14.23,35.326 15.087,35.326 15.219,35.194 v1(15.32,35.194)
  BOT w0.127: C140.2 14.28,35.194 v1(15.32,35.194) 15.871,35.194 R190.1
NetC141_1: C141.1 IC25.6 R199.2 | length 4.3
  TOP w0.127: v1@23.13,63.506 23.597,63.506 24.152,62.952 IC25.6
  BOT w0.127: v1(23.187,63.506) 23.684,63.506 C141.1 24.051,63.38 24.051,63.102 24.802,62.352 R199.2
NetC141_2: C141.2 IC25.7 R191.1 | length 4.8
  TOP w0.127: IC25.7 24.888,63.54 25.861,63.54 25.967,63.434 v1(26.068,63.434)
  BOT w0.127: C141.2 24.463,64.527 25.555,63.434 v1(26.068,63.434) 26.169,63.434 26.317,63.582 R191.1
NetC149_1: C149.1 IC26.2 R206.2 | length 4
  TOP w0.127: IC26.2 10.638,49.518 10.805,49.35 v1(11.237,49.35)
  BOT w0.127: R206.2 9.694,49.283 9.768,49.358 C149.1 10.5,49.35 v1(11.237,49.35)
NetC149_2: C149.2 IC26.1 R202.1 | length 4.1
  TOP w0.127: IC26.1 9.923,50.184 11.219,50.184 v1(11.235,50.2)
  BOT w0.127: R202.1 10.122,50.628 C149.2 10.551,50.2 v1(11.235,50.2)
NetC150_1: C150.1 IC27.2 R207.2 | length 3.5
  TOP w0.127: v1(8.314,63.18) 8.625,63.491 8.743,63.491 8.923,63.671 IC27.2
  BOT w0.127: C150.1 8.314,63.649 v1(8.314,63.18) 8.385,63.108 8.385,62.859 8.881,62.362 R207.2
NetC150_2: C150.2 IC27.1 R203.1 | length 3.6
  TOP w0.127: IC27.1 10.34,64.321 10.8,64.781 v1(10.8,64.801)
  BOT w0.127: C150.2 9.665,64.771 R203.1 9.696,64.801 v1(10.8,64.801)
NetC153_1: C153.1 IC26.6 R214.2 | length 4.3
  TOP w0.127: v1(12.7,48.958) 12.745,48.913 14.012,48.913 IC26.6
  BOT w0.127: v1(12.7,48.958) 12.758,49.015 12.991,49.015 C153.1 13.948,48.846 14.147,48.846 14.851,48.143 R214.2
NetC153_2: C153.2 IC26.7 R210.1 | length 3
  TOP w0.127: IC26.7 14.111,49.463 15.266,49.463 v1(15.32,49.409)
  BOT w0.127: C153.2 v1(15.32,49.409) 15.849,49.409 R210.1
NetC154_1: C154.1 IC27.6 R215.2 | length 3.2
  TOP w0.127: 12.801,63.083 13.773,63.083 IC27.6
  BOT w0.127: C154.1 12.574,63.833 v1(12.574,63.209) 12.574,63.108 12.649,63.033 12.649,62.757 R215.2 13.018,62.371 R215.2@12.756,62.632
NetC154_2: C154.2 IC27.7 R211.1 | length 4.6
  TOP w0.127: IC27.7 v1@14.939,63.671
  BOT w0.127: C154.2 13.635,63.671 14.939,63.671 15.371,63.671 R211.1@15.511,63.531
  other v1: 15.014,63.671
NetIC24_3: IC24.3 R184.2 | length 2.9
  TOP w0.127: IC24.3 11.216,34.738 v1(11.764,35.287)
  BOT w0.127: R184.2 11.255,34.558 11.693,34.996 11.693,35.215 v1(11.764,35.287)
NetIC24_5: IC24.5 R192.2 | length 2.7
  TOP w0.127: v1(12.981,33.211) 13.053,33.283 13.053,33.648 13.493,34.088 IC24.5
  BOT w0.127: R192.2 12.393,33.392 12.7,33.392 12.881,33.211 v1(12.981,33.211)
NetIC25_3: IC25.3 R185.2 | length 2
  TOP w0.127: IC25.3 21.92,62.952 v1(21.95,62.922)
  BOT w0.127: v1(21.95,62.922) 22.42,62.922 R185.2
NetIC25_5: IC25.5 R193.2 | length 2.2
  TOP w0.127: v1(24.566,61.423) 24.566,61.524 24.827,61.785 IC25.5
  BOT w0.127: R193.2 23.726,61.59 24.069,61.59 24.185,61.474 24.515,61.474 v1(24.566,61.423)
NetIC26_3: IC26.3 R204.2 | length 2.2
  TOP w0.127: IC26.3 10.934,48.868 11.129,48.672 v1(11.18,48.672)
  BOT w0.127: R204.2 10.765,48.001 11.109,48.345 11.109,48.601 v1(11.18,48.672)
NetIC26_5: IC26.5 R212.2 | length 1.8
  TOP w0.127: IC26.5@13.974,48.136 IC26.5 ; IC26.5@13.975,48.136 14.042,48.069 v1(14.042,47.476)
  BOT w0.127: R212.2 13.927,47.958 14.001,47.883 14.001,47.517 v1(14.042,47.476)
NetIC27_3: IC27.3 R205.2 | length 2.3
  TOP w0.127: IC27.3 10.345,63.021 10.962,63.638 v1(10.962,63.654)
  BOT w0.127: R205.2 10.962,62.932 v1(10.962,63.654)
NetIC27_5: IC27.5 R213.2 | length 2.7
  TOP w0.127: v1(13.835,61.731) IC27.5
  BOT w0.127: R213.2 12.32,61.918 12.395,61.844 12.395,61.792 12.506,61.68 13.785,61.68 v1(13.835,61.731)
NetJ23_1: J23.1 R198.1 R200.2 | length 14.1
  TOP w0.127: v1(15.32,32.904) 15.656,33.24 15.656,33.659 16.068,34.071 R200.2
  L2 w0.127: J23.1 8.3,29.968 10.317,31.985 12.626,31.985 13.972,33.331 14.893,33.331 v1(15.32,32.904)
  BOT w0.127: R198.1 14.968,33.256 v1(15.32,32.904)
NetJ23_4: J23.4 R190.2 | length 8.7
  BOT w0.127: J23.4 17.417,29.131 17.417,34.525 17.147,34.794 17.147,35.077 R190.2
NetJ23_5: J23.5 R186.1 R188.2 | length 15.4
  TOP w0.127: R188.2 7.707,34.003 v1(7.707,33.211) 7.707,32.054 10.037,29.724 16.09,29.724 J23.5
  BOT w0.127: v1(7.707,33.211) 7.707,34.086 R186.1
NetJ23_8: J23.8 R182.2 | length 22.7
  TOP w0.127: v1(8.695,32.904) 11.393,30.207 23.107,30.207 J23.8
  BOT w0.127: R182.2 8.669,36.122 8.669,32.931 v1(8.695,32.904)
NetJ24_1: J24.1 R199.1 R201.2 | length 26.1
  TOP w0.127: R201.2 R201.2@26.867,62.261 ; v1(26.903,58.959) 26.903,62.225 R201.2@26.867,62.261 ; v1(27.97,62.261) R201.2@26.867,62.261
  BOT w0.127: J24.1 8.553,55.767 9.441,55.767 12.633,58.959 v1(26.903,58.959) ; R199.1 26.442,62.261 v1(27.97,62.261)
NetJ24_4: J24.4 R191.2 | length 18.9
  BOT w0.127: J24.4 17.417,57.131 26.573,57.131 28.41,58.968 28.41,62.444 28.401,62.453 28.401,62.902 27.741,63.562 R191.2
NetJ24_5: J24.5 R187.1 R189.2 | length 8.6
  TOP w0.127: J24.5 18.3,62.009 R189.2 18.699,62.408 v1(18.699,63.061)
  BOT w0.127: v1(18.699,63.061) 18.699,62.414 R187.1
NetJ24_8: J24.8 R183.2 | length 12.9
  TOP w0.127: v1(19.765,59.544) 20.883,59.544 24.66,55.767 25.547,55.767 J24.8
  BOT w0.127: v1(19.765,59.544) 19.8,59.578 19.8,62.728 20.033,62.962 R183.2
NetJ26_1: J26.1 R214.1 R216.2 | length 17
  TOP w0.127: J26.1 9.441,42.654 16.488,42.654 16.693,42.449 v1(16.794,42.449) ; R216.2 16.35,48.218 v1(17.417,48.218)
  BOT w0.127: v1(16.794,42.449) 16.794,42.825 16.451,43.168 R214.1 17.191,48.093 17.316,48.218 v1(17.417,48.218)
NetJ26_4: J26.4 R210.2 | length 10
  BOT w0.127: J26.4 16.28,41.514 16.775,42.009 16.976,42.009 17.962,42.995 17.962,49.008 17.663,49.307 R210.2
NetJ26_5: J26.5 R206.1 R208.2 | length 18.1
  TOP w0.127: R208.2 v1(7.606,49.16) ; v1(8.132,42.856) 8.185,42.908 16.958,42.908 18.3,41.566 J26.5
  BOT w0.127: v1(7.606,49.16) 7.606,49.059 7.707,48.958 7.707,48.67 R206.1 8.094,42.971 8.132,42.932 v1(8.132,42.856)
NetJ26_8: J26.8 R202.2 | length 26.9
  TOP w0.127: v1(7.192,43.288) 7.835,43.288 7.844,43.296 23.13,43.296 24.66,41.767 25.547,41.767 J26.8
  BOT w0.127: v1(7.192,43.288) 7.16,43.321 7.16,50.055 7.713,50.608 R202.2
NetJ27_1: J27.1 R215.1 R217.2 | length 19.1
  TOP w0.127: R217.2 16.25,62.514 16.898,62.514 17.512,63.128 17.471,63.169 17.471,65.953 16.768,66.656 v1(16.717,66.656)
  BOT w0.127: J27.1 8.3,68.139 9.783,66.656 v1(16.717,66.656) ; R215.1 16.755,62.371 v1(17.417,63.033)
NetJ27_4: J27.4 R211.2 | length 6.8
  BOT w0.127: J27.4 17.158,68.156 17.158,65.242 16.451,64.535 R211.2@16.451,63.531
NetJ27_5: J27.5 R207.1 R209.2 | length 18
  TOP w0.127: R209.2 7.273,62.346 6.634,62.985 6.634,63.021 v1(6.583,63.072) 6.532,63.122 6.532,65.157 8.488,67.113 15.899,67.113 J27.5
  BOT w0.127: v1(6.583,63.072) 6.583,63.061 7.281,62.362 R207.1
NetJ27_8: J27.8 R203.2 | length 20.1
  TOP w0.127: v1(16.032,66.173) 16.052,66.194 16.052,66.613 16.552,67.113 17.512,67.113 19.55,69.151 19.55,69.877 20.328,70.654 23.772,70.654 24.66,69.767 25.547,69.767 J27.8
  BOT w0.127: R203.2 10.472,63.851 12.795,66.173 v1(16.032,66.173)
P1V2_REFC: C133.2 IC10.6 R184.1 R185.1 R192.1 R193.1 R204.1 R205.1 R212.1 R213.1 | length 83.3
  TOP w0.127: v1(19.359,60.864) 19.384,60.839 20.375,60.839 v1(20.4,60.814) ; v1(27.97,60.864) 27.995,60.839 28.683,60.839 28.757,60.913 28.757,66.356 27.32,67.793 27.32,69.814 27.959,70.453 C133.2 29.081,70.32 IC10.6
  BOT w0.127: R213.1 11.665,62.632 11.622,62.632 10.972,61.982 R205.1 10.952,61.194 ; R192.1 12.146,34.558 11.481,33.893 11.481,33.845 11.255,33.618 R184.1 11.215,33.618 10.06,32.463 7.331,32.463 6.583,33.211 6.583,51.224 7.16,51.8 7.16,52.352 ; R212.1@12.354,48.204 12.577,47.981 R212.1@12.623,47.981 ; R212.1 12.488,47.981 R204.1 11.705,48.675 11.898,48.868 11.898,50.608 10.153,52.352 7.16,52.352 ; v1(19.359,60.864) 11.281,60.864 10.952,61.194 ; v1(20.4,60.814) 20.451,60.864 22.325,60.864 22.585,61.124 ; R193.1 23.479,62.757 22.831,62.109 22.831,62.043 22.605,61.817 R185.1 22.585,61.124 ; v1(27.97,60.864) 22.844,60.864 22.585,61.124 ; 7.16,52.352 7.16,56.944 7.281,57.066 7.281,60.382 8.094,61.194 10.952,61.194
P3V3_AFEC: C116.2 C125.2 D35.5 IC20.4 IC21.5 TP14.1 | length 14.1
  TOP w0.254: TP14.1 29.182,5.013 29.182,6.309 v1(29.182,6.36) 31.931,6.36 C125.2 31.943,6.61 31.943,8.117 IC21.5@31.77,8.29 ; IC21.5 IC21.5@31.77,8.29 ; v1(34.042,11.286) 34.042,11.226 33.507,10.69 33.319,10.69 32.612,9.983 32.612,9.14 32.16,8.688 32.16,8.463 31.987,8.29 IC21.5@31.77,8.29
  BOT w0.254: IC20.4 29.005,8.45 29.178,8.277 C116.2 29.18,6.999 29.18,6.362 v1(29.182,6.36) ; v1(34.042,11.286) 34.059,11.27 34.059,10.416 D35.5
P5V0_AFEC: C132.1 C134.2 C135.2 C142.2 C143.2 IC10.2 IC10.3 IC24.8 IC25.8 IC26.8 IC27.8 J15.33 R45.1 | length 162.4
  TOP w0.127: IC27.8@13.772,64.384 IC27.8 ; v1(14.025,50.679) 14.025,50.199 IC26.8 ; v1(34.638,68.967) 34.638,70.213 34.745,70.32 IC10.3 ; IC10.2 37.947,69.05 C132.1
  TOP w0.3: IC27.8@13.772,64.384 v1(13.772,65.157) ; IC25.8 v1(24.827,64.801)
  TOP w0.5: IC24.8 14.744,36.038 14.769,36.063 v1(14.769,37.054) ; v1(34.638,68.967) 34.67,69 36.145,69 IC10.2 ; R45.1 v1(37.205,6.98)
  L2 w0.127: v1(13.772,65.157) 13.772,65.258 13.949,65.434 13.949,65.563 15.866,65.563 15.967,65.665 17.81,65.665 v1(17.911,65.767)
  L2 w0.5: J15.33 36.355,28.324 40.516,24.163 40.516,13.634 37.205,10.323 v1(37.205,6.98)
  BOT w0.127: v1(13.772,65.157) 13.844,65.086 13.844,64.728 13.974,64.598 C143.2 ; v1(14.025,50.679) 14.423,50.679 14.43,50.671 14.497,50.671 C135.2 ; v1(17.911,65.767) 23.861,65.767 v1(24.827,64.801) 25.284,64.801 C134.2
  BOT w0.5: C135.2 14.743,51.223 15.32,51.8 18.3,51.8 18.877,51.224 23.638,51.224 ; C142.2 v1(14.769,37.054) 14.769,37.755 15.521,38.507 27.448,38.507 27.741,38.799 27.741,44.703 23.638,48.806 23.638,51.224 ; C134.2 25.522,64.684 25.522,64.937 26.697,66.112 ; 26.733,66.147 38.36,66.147 38.653,65.854 38.653,57.41 ; 34.638,66.197 v1(34.638,68.967) ; J15.33 38.966,31.189 38.966,57.41 38.653,57.41 ; 23.638,51.224 29.824,57.41 38.653,57.41
SENSC0_1: J15.23 J23.7 | length 17.9
  L2 w0.127: J23.7 23.3,32.641 29.284,38.624 33.548,38.624 J15.23
SENSC0_2: J15.8 J23.6 | length 17.8
  L2 w0.127: J23.6 20.8,31.774 28.8,39.774 J15.8
SENSC1_1: J15.24 J23.3 | length 26.4
  L2 w0.127: J23.3 13.514,27.728 13.514,28.654 17.2,32.34 20.045,32.34 28.619,40.914 33.548,40.914 J15.24
SENSC1_2: J15.9 J23.2 | length 28.5
  L2 w0.127: J23.2 11.053,27.767 11.053,31.656 11.128,31.731 14.951,31.731 15.991,32.771 19.9,32.771 29.193,42.064 J15.9
SENSC2_1: J15.25 J26.7 | length 11
  L2 w0.127: J26.7 24.991,43.204 33.548,43.204 J15.25
SENSC2_2: J15.10 J26.6 | length 11.4
  L2 w0.127: J26.6 23.64,44.354 J15.10
SENSC3_1: J15.26 J26.3 | length 21.9
  L2 w0.127: J26.3 17.281,45.494 33.548,45.494 J15.26
SENSC3_2: J15.11 J26.2 | length 22.3
  L2 w0.127: J26.2 15.93,46.644 J15.11
SENSC4_1: J15.27 J24.7 | length 15.1
  L2 w0.127: v1(23.652,52.838) 23.686,52.804 23.686,52.397 28.299,47.784 33.548,47.784 J15.27
  BOT w0.127: J24.7 23.58,55.234 23.58,52.909 v1(23.652,52.838)
SENSC4_2: J15.12 J24.6 | length 15.4
  L2 w0.127: v1(21.087,52.352) 22.013,53.278 23.897,53.278 28.242,48.934 J15.12
  BOT w0.127: J24.6 20.8,52.688 21.087,52.402 v1(21.087,52.352)
SENSC5_1: J15.28 J24.3 | length 22.5
  L2 w0.127: J24.3 15.281,53.532 24.634,53.532 28.092,50.074 33.548,50.074 J15.28
SENSC5_2: J15.13 J24.2 | length 23.4
  L2 w0.127: J24.2 11.053,55.767 11.941,55.767 12.828,56.654 13.772,56.654 14.441,55.986 14.441,55.26 15.646,54.055 21.091,54.055 21.36,53.786 25.348,53.786 27.911,51.224 J15.13
SENSC6_1: J15.29 J27.7 | length 22.6
  L2 w0.127: J27.7 34.955,57.859 34.955,53.746 J15.29
SENSC6_2: J15.14 J27.6 | length 25.4
  L2 w0.127: J27.6 24.505,65.809 25.045,65.809 34.701,56.153 34.701,54.169 34.032,53.501 31.033,53.501 J15.14
SENSC7_1: J15.30 J27.3 | length 26.6
  L2 w0.127: J27.3 15.464,67.35 20.861,67.35 27.787,60.424 28.013,60.424 33.56,54.877 J15.30
SENSC7_2: J15.15 J27.2 | length 26
  L2 w0.127: J27.2 13.218,67.096 17.251,67.096 19.509,64.838 19.509,64.739 22.258,61.991 24.833,61.991 J15.15
TECC0+: J14.5 J15.31 J15.32 | length 26.3
  TOP w1: J14.5 28.318,9.771 28.318,11.758 29.799,13.239 29.799,16.752 32.161,19.114 34.152,19.114 36.1,21.061 J15.31 J15.32
TECC0-: J14.4 J15.1 J15.16 | length 26.1
  TOP w1: J14.4 20.722,5.756 28.12,13.154 28.12,18.264 30.332,20.476 31.454,20.476 J15.16 33.316,22.582 32.866,23.032 32.851,23.032 32.312,23.572 31.192,23.572 J15.1
TECC1+: J14.2 J15.2 J15.17 | length 33.7
  TOP w1: J14.2 13.117,5.756 14.694,7.333 19.356,7.333 26.962,14.938 26.962,21.976 J15.2 31.192,25.862 32.327,25.862 33.316,24.872 J15.17
TECC1-: J14.1 J15.3 J15.18 | length 37.5
  TOP w1: J14.1 13.825,10.517 18.646,10.517 22.303,14.174 22.303,19.607 J15.3 31.192,28.152 32.327,28.152 33.316,27.162 J15.18
TECC2+: J15.4 J15.19 J16.5 | length 19.2
  L2 w1: J16.5@24.172,17.595 28.84,22.263 28.84,28.944 30.06,30.164 30.326,30.164 30.776,30.614 J15.4 31.192,30.442 32.327,30.442 33.316,29.452 J15.19
TECC2-: J15.5 J15.20 J16.4 | length 23.2
  L2 w1: J16.4@20.362,17.595 27.512,24.745 27.512,30.213 30.03,32.732 30.848,32.732 J15.5 31.192,32.732 32.327,32.732 33.316,31.742 J15.20
TECC3+: J15.6 J15.21 J16.2 | length 32.9